# Altium PCB B219.PcbDoc
Units mm, origin at the board's own origin, x right, y up, seen from the top; angles counter-clockwise.
Board outline 22 x 40 mm, 4 copper layers (Top Copper, Signal Layer 1, Signal Layer 2, Bottom Copper), stack 1.57 mm thick; 31 components, 34 nets, 141 pads, 138 vias.
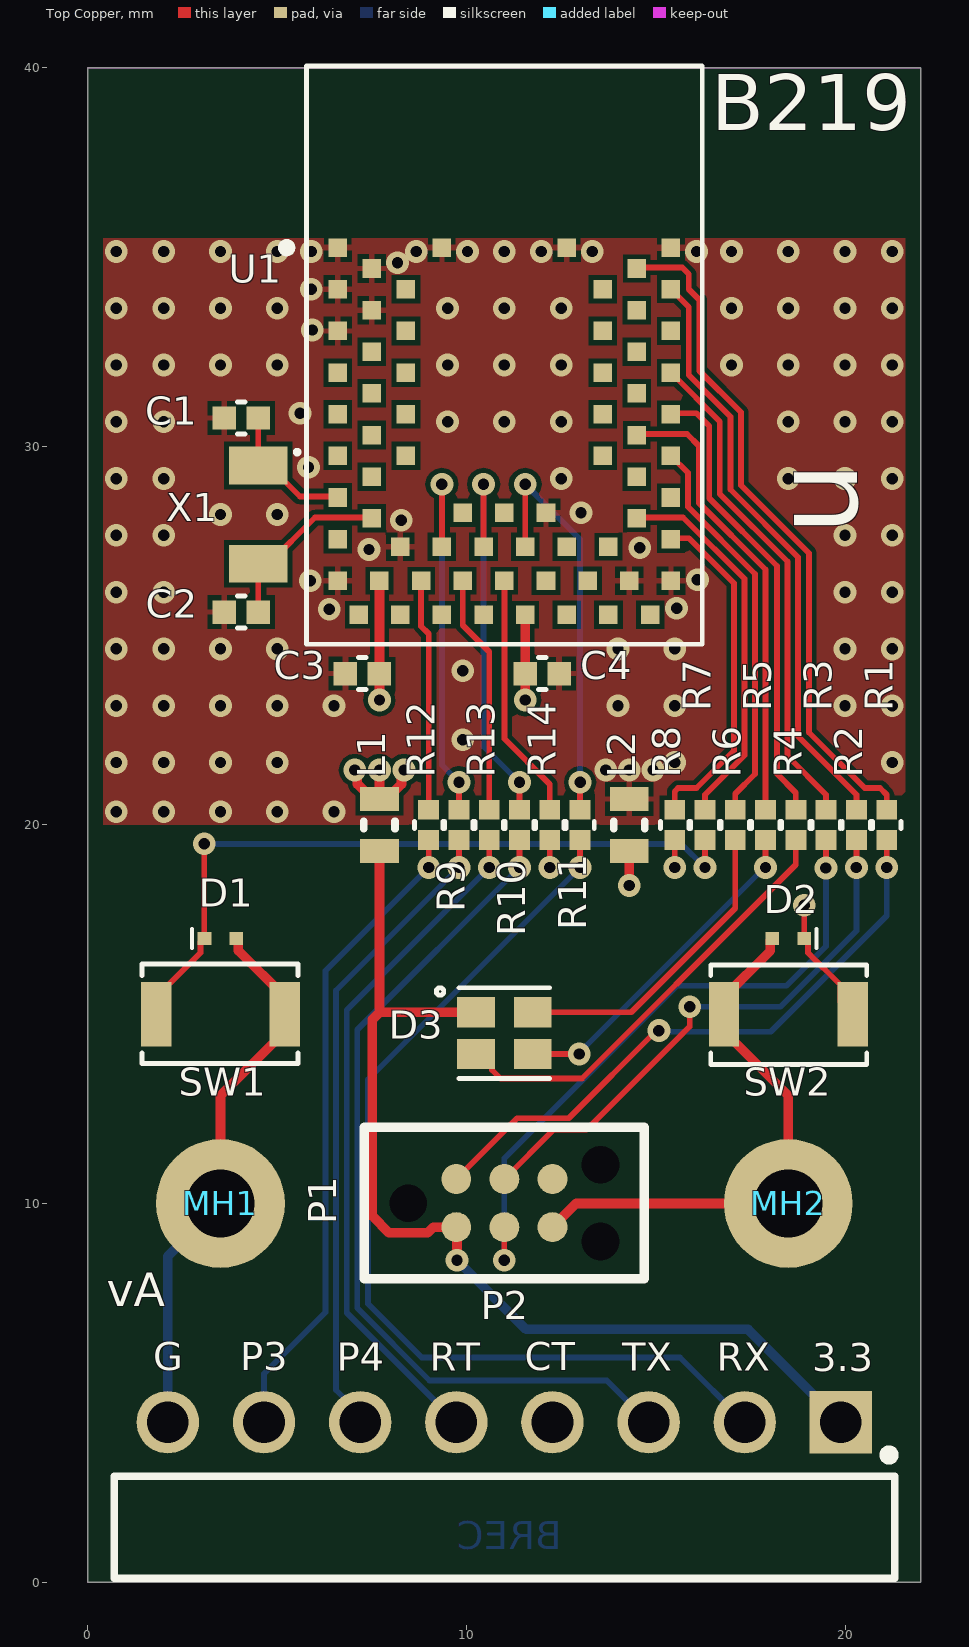
[diagram p0: Top Copper view]
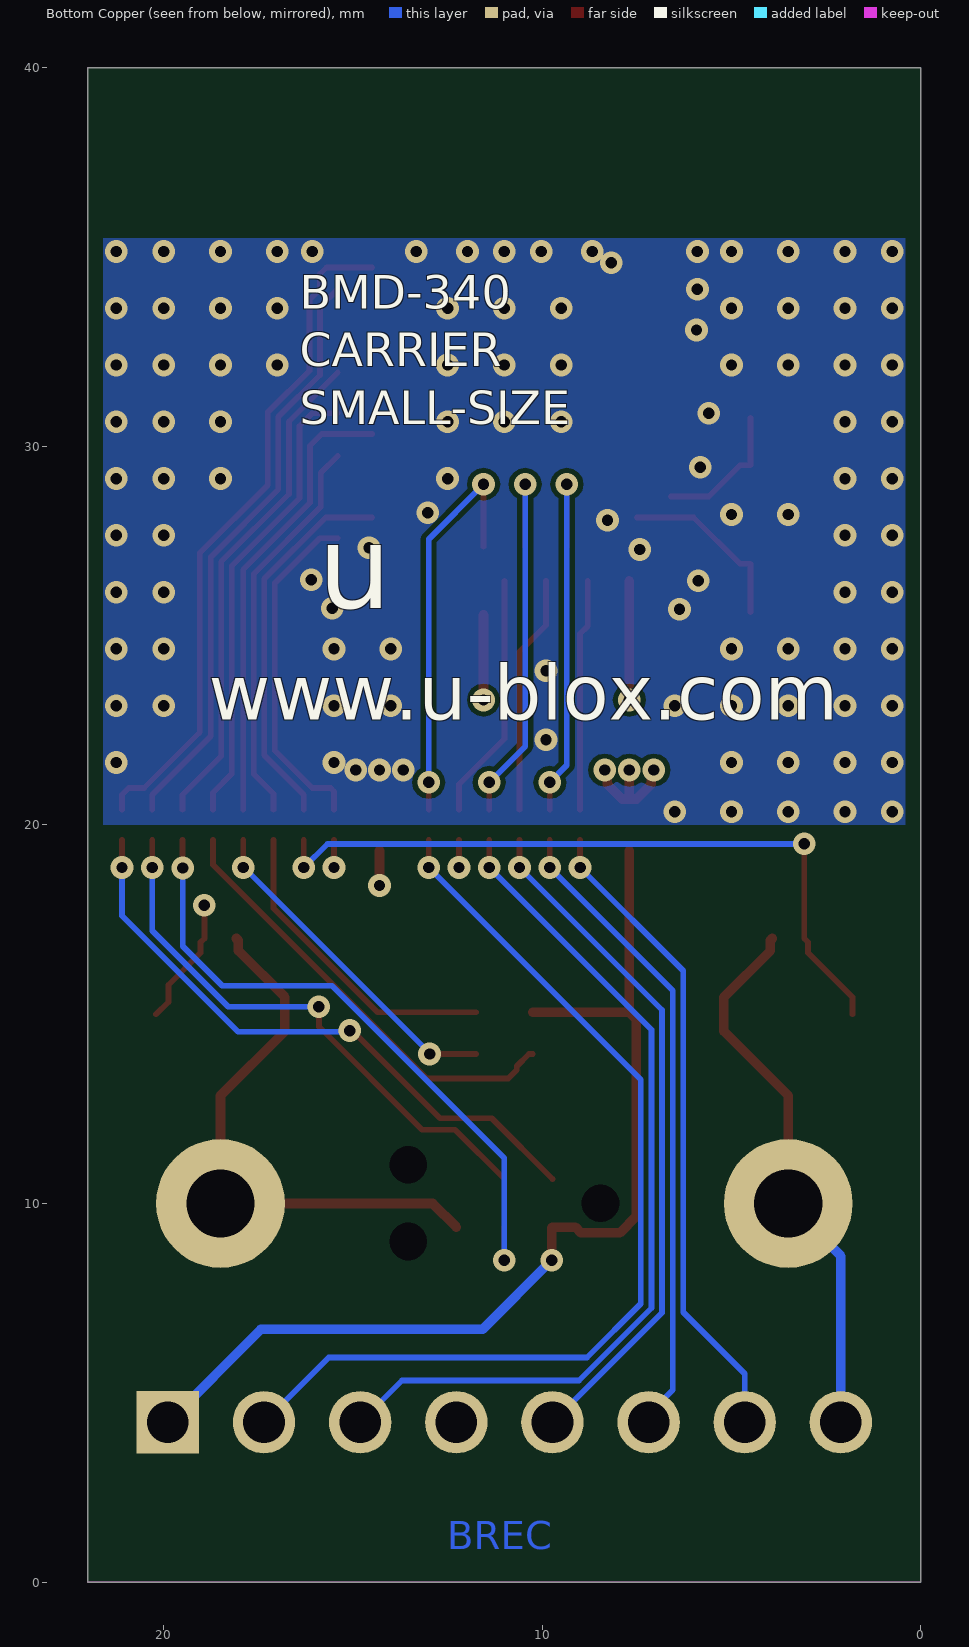
[diagram p1: Bottom Copper view, seen from below]
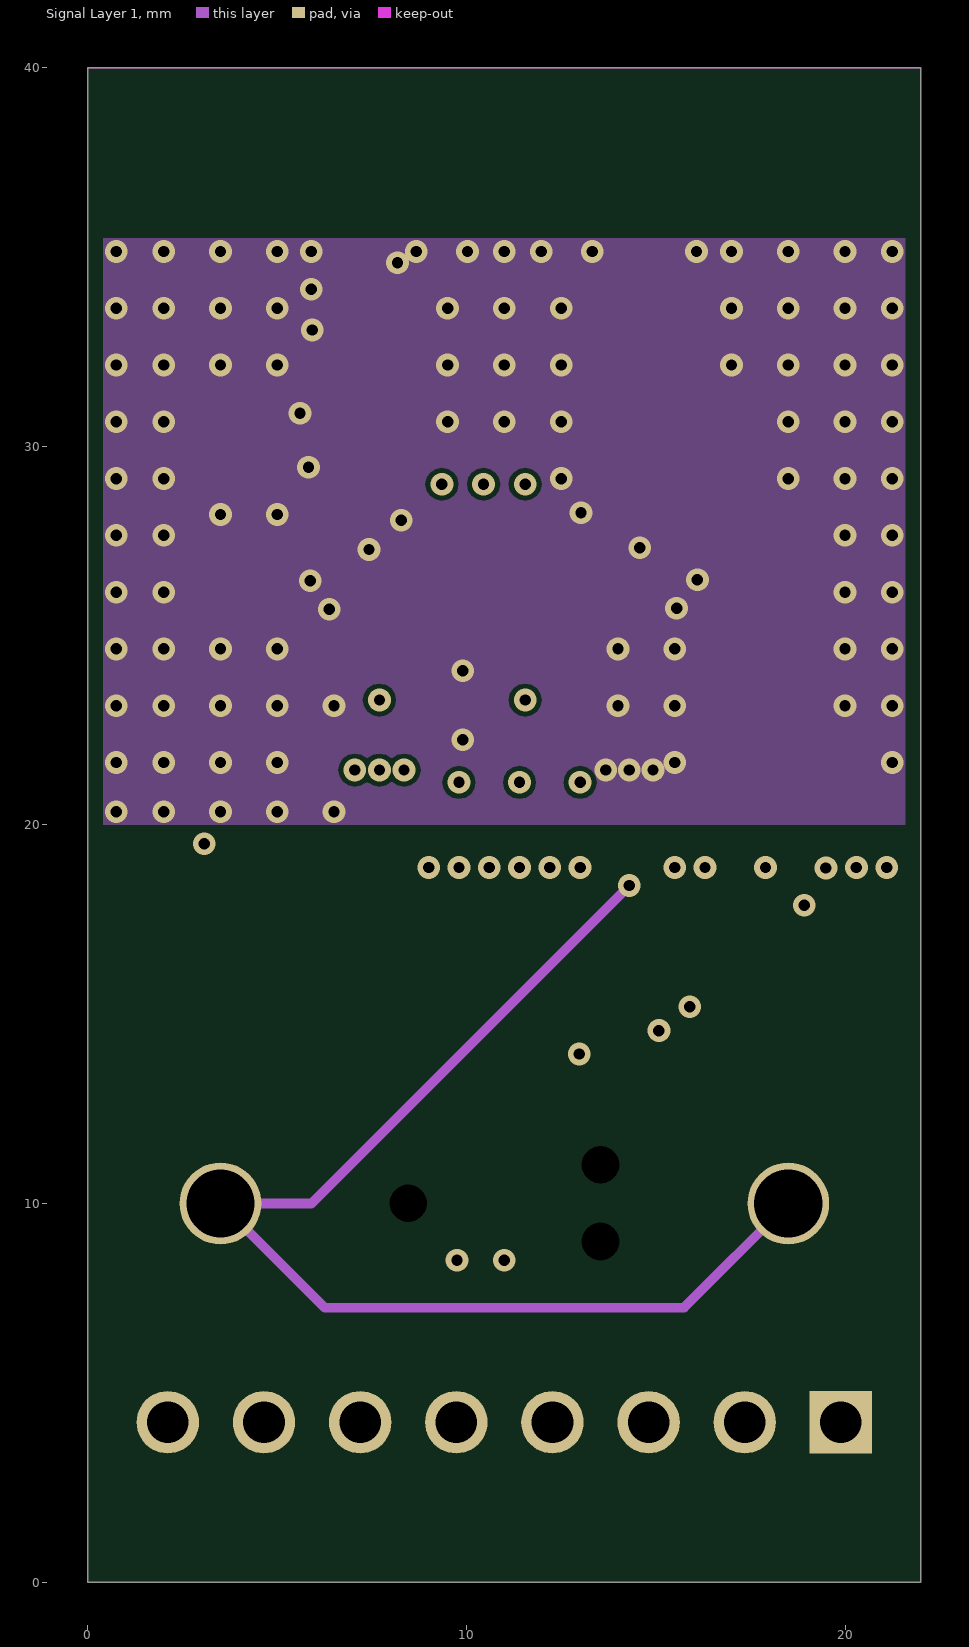
[diagram p2: Signal Layer 1]
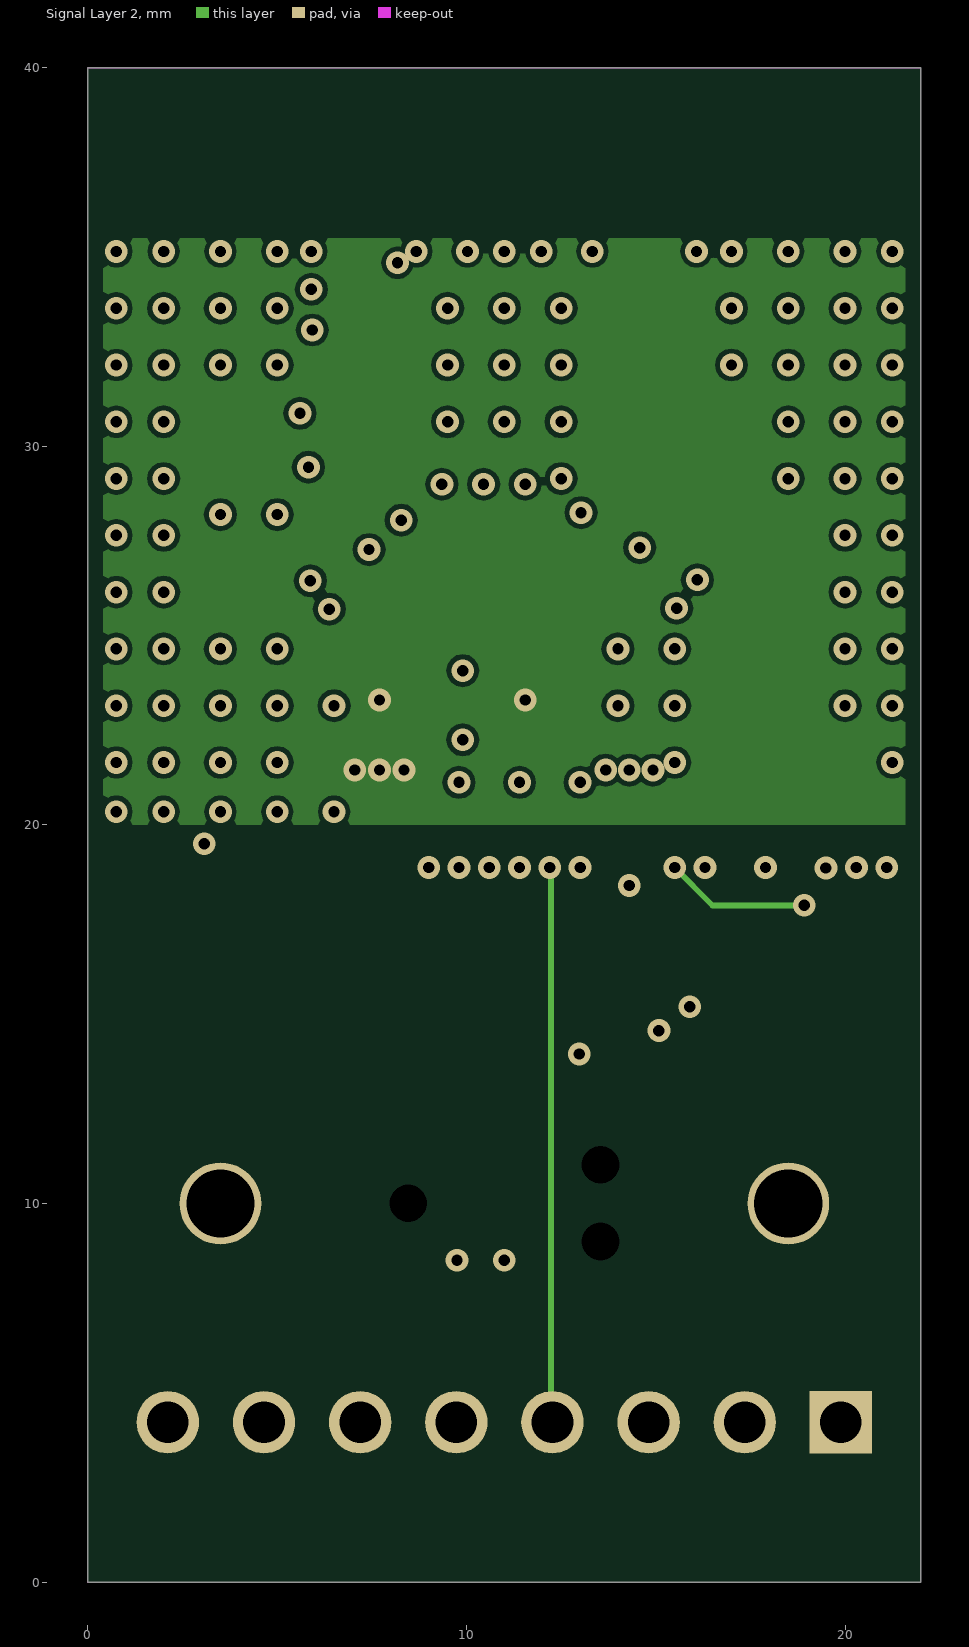
[diagram p3: Signal Layer 2]

## Layer stack, top to bottom
Top Mask: solder mask 0.015, Solder Resist, Dk 3.8
Top Copper: signal copper 0.035
Dielectric 1: prepreg 0.1, 2313, Dk 4.05
Signal Layer 1: signal copper 0.0175
Core: core 1.265, FR-4, Dk 4.5
Signal Layer 2: signal copper 0.0175
Dielectric 2: prepreg 0.1, 2313, Dk 4.05
Bottom Copper: signal copper 0.035
Bottom Mask: solder mask 0.015, Solder Resist, Dk 3.8

## Board outline
0,40 22,40 22,0 0,0

## Design rules (kind name [scope] priority, off if disabled: settings)
BoardOutlineClearance [All] p1: gap=0.4 ignorepadtopadclearanceinfootprint=FALSE
Clearance "Stitching GND" [IsStitchingVia and InNet('GND') vs (IsVia and (Not IsStitchingVia)) Or IsPad] p1: gap=0.127 ignorepadtopadclearanceinfootprint=TRUE
Clearance Clearance_Poly [InPolygon vs OnLayer('Keep-Out Layer') OR (OnLayer('Multi-Layer') AND IsPad  AND Not(PadIsPlated))] p2: gap=0.127 ignorepadtopadclearanceinfootprint=TRUE
Clearance [All] p3: gap=0.127 ignorepadtopadclearanceinfootprint=FALSE except(0: Arc-Text Arc-Hole Track-Text Track-Hole SMDPad-Text SMDPad-Hole THPad-Text THPad-Hole Via-Text Via-Hole Fill-Text Fill-Hole Poly-Text Poly-Hole Region-Text Region-Hole Text-Text Text-Hole)
ComponentClearance [All] p1: gap=0.127 collisioncheckmode=3 verticalgap=0.254 showdistances=FALSE
DiffPairsRouting .14 [All] p1: maxlimit=0.254 minlimit=0.1 mostfreqgap=0.254 toplayer_maxgap=0.1 toplayer_prefgap=0.1 toplayer_minwidth=0.1 toplayer_maxwidth=0.1 toplayer_prefwidth=0.1 midlayer1_mingap=0.254 midlayer1_minwidth=0.381 midlayer1_maxwidth=0.381 midlayer1_prefwidth=0.381 midlayer2_mingap=0.254 midlayer2_minwidth=0.381 midlayer2_maxwidth=0.381 midlayer2_prefwidth=0.381 bottomlayer_maxgap=0.1 bottomlayer_prefgap=0.1 bottomlayer_minwidth=0.1 bottomlayer_maxwidth=0.1 bottomlayer_prefwidth=0.1 maxuncoupledlength=12.7
Height [All] p1: minheight=0 maxheight=25.4 prefheight=2.54
HoleSize [All] p1: absolutevalues=TRUE maxlimit=2540 minlimit=0.127 maxpercent=80.000 minpercent=20.000
HoleToHoleClearance [All] p1: gap=0.152 allowstackedmicrovias=TRUE
MinimumSolderMaskSliver [All] p1: minsoldermaskwidth=0.025
PlaneClearance [InPoly] p1: clearance=0.254
PlaneConnect [All] p1: pad.planeconnectstyle=Relief pad.reliefexpansion=0.508 pad.reliefentries=4 pad.reliefconductorwidth=0.254 pad.reliefairgap=0.254 via.planeconnectstyle=Direct via.reliefexpansion=0.508 via.reliefentries=4 via.reliefconductorwidth=0.254 via.reliefairgap=0.254
PolygonConnect ThermalVias [IsVia] p1: connectstyle=Direct reliefconductorwidth=0.254 reliefentries=4 polygonreliefangle="90 Angle" airgapwidth=0.254
PolygonConnect "PolygonConnect - Power" [InNetClass('')] p2: connectstyle=Relief reliefconductorwidth=0.254 reliefentries=4 polygonreliefangle="90 Angle" airgapwidth=0.127
PolygonConnect PolygonConnect-BGA [InComponentClass('')] p3: connectstyle=Relief reliefconductorwidth=0.152 reliefentries=4 polygonreliefangle="45 Angle" airgapwidth=0.152
PolygonConnect PolygonConnect-General [All] p4: connectstyle=Relief reliefconductorwidth=0.152 reliefentries=4 polygonreliefangle="90 Angle" airgapwidth=0.127
RoutingVias [All] p1: holewidth=0.3 width=0.6 viastyle="Through Hole" minholewidth=0.2 minwidth=0.5 maxholewidth=7 maxwidth=1
SMDEntry [All] p1 off: side=TRUE corner=TRUE anyangle=TRUE
SilkToBoardRegionClearance [All] p1 off:
SilkToSilkClearance [All] p1 off: silktosilkclearance=0.025
SilkToSolderMaskClearance [IsPad] p1 off: minsilkscreentomaskgap=0 clearancetoexposedcopper=TRUE
SolderMaskExpansion SolderMaskExpansion_via [IsVia] p1: expansion=-0.254 istentingtop=TRUE
SolderMaskExpansion [All] p2: expansion=0.05 istentingtop=FALSE
UnRoutedNet [All] p1: checkbadconnections=TRUE
ViasUnderSMD [All] p1: allowed=FALSE
Width [All] p1: maxlimit=2.54 minlimit=0.127 preferedwidth=0.152 toplayer_maxwidth=0.254 toplayer_prefwidth=0.152 bottomlayer_maxwidth=0.254 bottomlayer_prefwidth=0.152 minimp=50.000000 maximp=50.000000 favimp=50.000000
Width Width_1 [All] p2: maxlimit=0.254 minlimit=0.254 preferedwidth=0.254
18 further rules are at their usual default settings.

## Components (designator, comment, footprint, x,y, rotation, side; value= is the part's Value field where it differs from the comment)
C1 "UBXH01-000411410P" "Cap 0402" 4.05,30.75 r180 top value=10P
C2 "UBXH01-000411410P" "Cap 0402" 4.05,25.625 r180 top value=10P
C3 "UBXH01-2021002100N" "Cap 0402" 7.25,24 r180 top value=100N
C4 "UBXH01-2021002100N" "Cap 0402" 12,24 r0 top value=100N
D1 "110-00019" SOD-923 3.5,17 r0 top
D2 "110-00019" SOD-923 18.5,17 r180 top
D3 "115-00011" 4-PLCC 11,14.5 r180 top
L1 "LQW18AN22NJ10D" INDC1608X100X30LL20T10 7.7,20 r90 top
L2 "LQW18AN22NJ10D" INDC1608X100X30LL20T10 14.3,20 r90 top
MH1 "MH_M1.5DNP" MH_M1.5 3.5,10 r0 top
MH2 "MH_M1.5DNP" MH_M1.5 18.5,10 r0 top
P1 "TC2030-IDC-NLDNP" TC2030-IDC-NL 8.46,10.01 r0 top
P2 "61300811021" 61300811021 11,1.45 r0 top
R1 "UBXH18-0008033220R" "RES 0402 HD" 21.1,20 r270 top value=220R
R2 "UBXH18-0008033220R" "RES 0402 HD" 20.3,20 r270 top value=220R
R3 "UBXH18-0008033220R" "RES 0402 HD" 19.5,20 r270 top value=220R
R4 "180-00031499R" "RES 0402 HD" 18.7,20 r270 top value=499R
R5 "180-00098220R" "RES 0402 HD" 17.9,20 r270 top value=220R
R6 "180-00098220R" "RES 0402 HD" 17.1,20 r270 top value=220R
R7 "UBXH18-0008033220R" "RES 0402 HD" 16.3,20 r270 top value=220R
R8 "UBXH18-0008033220R" "RES 0402 HD" 15.5,20 r270 top value=220R
R9 "UBXH18-0008033220R" "RES 0402 HD" 9.8,20 r90 top value=220R
R10 "UBXH18-0008033220R" "RES 0402 HD" 11.4,20 r90 top value=220R
R11 "UBXH18-0008033220R" "RES 0402 HD" 13,20 r90 top value=220R
R12 "UBXH18-0008033220R" "RES 0402 HD" 9,20 r90 top value=220R
R13 "UBXH18-0008033220R" "RES 0402 HD" 10.6,20 r90 top value=220R
R14 "UBXH18-0008033220R" "RES 0402 HD" 12.2,20 r90 top value=220R
SW1 "135-00007" B3U-1000P 3.5,15 r0 top
SW2 "135-00007" B3U-1000P 18.5,15 r180 top
U1 "=Value" BMD_LGA68S_1500X1020X190_PCB 11,32.4 r0 top
X1 "100-00005" XTAL_3215 4.5,28.2 r270 top

## Footprints (in the part's own frame and the unit in brackets; to place one, negate y for a bottom-side part, rotate by r counter-clockwise, add the part's x,y. Pads: shape width x height; smd on the part's side, far side on the other; paste and mask are expansions set on the pad)
4-PLCC [mm] "4 Pin Plastic Leaded Chip Carrier, 2mm x 2mm"
  rect 1x0.8 smd: 1(0.75,-0.55) 2(-0.75,-0.55) 3(-0.75,0.55) 4(0.75,0.55)
  silkscreen extent -1.2,-1.2 1.8,1.2, body extent -1.05,-1.05 1.05,1.05, height 1.01
61300811021 [mm]
  rect 1.65x1.65 hole 1.1: 1(8.89,2.77)
  round 1.65 hole 1.1: 2(6.35,2.77) 3(3.81,2.77) 4(1.27,2.77) 5(-1.27,2.77) 6(-3.81,2.77) 7(-6.35,2.77) 8(-8.89,2.77)
  silkscreen extent -10.31,-1.35 10.31,2.03, body extent -10.16,-7.27 10.16,3.09, height 2.58
B3U-1000P [mm] "Button Tactile, SMT 4mm x 2.5mm, height 1.2mm"
  rect 0.8x1.7 smd: 1(-1.7,0) 2(1.7,0)
  silkscreen extent -2.07,-1.3 2.05,1.33, body extent -2,-1.25 2,1.25, height 1.6
BMD_LGA68S_1500X1020X190_PCB [mm] "LGA, 68pin, 1.1mm Pitch, 15mm x 10.2mm"
  rect 0.49x0.49 smd: 1(-4.4,2.85) 2(-3.5,2.3) 3(-4.4,1.75) 4(-3.5,1.2) 5(-4.4,0.65) 6(-3.5,0.1) 7(-4.4,-0.45) 8(-3.5,-1) 9(-4.4,-1.55) 10(-3.5,-2.1) 11(-4.4,-2.65) 12(-3.5,-3.2) 13(-4.4,-3.75) 14(-3.5,-4.3) 15(-4.4,-4.85) 16(-4.4,-5.95) 17(-3.3,-5.95) 18(-2.75,-5.05) 19(-2.2,-5.95) 20(-1.65,-5.05) 21(-1.1,-5.95) 22(-0.55,-5.05) 23(0,-5.95) 24(0.55,-5.05) 25(1.1,-5.95) 26(1.65,-5.05) 27(2.2,-5.95) 28(2.75,-5.05) 29(3.3,-5.95) 30(4.4,-5.95) 31(4.4,-4.85) 32(3.5,-4.3) 33(4.4,-3.75) 34(3.5,-3.2) 35(4.4,-2.65) 36(3.5,-2.1) 37(4.4,-1.55) 38(3.5,-1) 39(4.4,-0.45) 40(3.5,0.1) 41(4.4,0.65) 42(3.5,1.2) 43(4.4,1.75) 44(3.5,2.3) 45(4.4,2.85) 46(1.65,2.85) 47(-1.65,2.85) 48(-2.6,1.75) 49(-2.6,0.65) 50(-2.6,-0.45) 51(-2.6,-1.55) 52(-2.6,-2.65) 53(-1.1,-4.15) 54(0,-4.15) 55(1.1,-4.15) 56(2.6,-2.65) 57(2.6,-1.55) 58(2.6,-0.45) 59(2.6,0.65) 60(2.6,1.75) 61(-3.85,-6.85) 62(-2.75,-6.85) 63(-1.65,-6.85) 64(-0.55,-6.85) 65(0.55,-6.85) 66(1.65,-6.85) 67(2.75,-6.85) 68(3.85,-6.85)
  Multi-Layer pour cut-out: -5.1,3.1 5.1,3.1 5.1,7.5 -5.1,7.5
  silkscreen extent -5.85,-7.63 5.23,7.65, body extent -5.1,-7.5 5.1,7.5, height 1.87
"Cap 0402" [mm] "Chip Capacitor, 2-Leads, Body 1.00x0.50mm, IPC Medium Density"
  rect 0.62x0.62 smd: 1(-0.45,0) 2(0.45,0)
  silkscreen extent -0.1,-0.43 0.1,0.43, body extent -0.55,-0.3 0.55,0.3, height 0.6
INDC1608X100X30LL20T10 [mm] "Chip Inductor, 2-Leads, Body 1.8x1.1mm, IPC High Density"
  rect 0.64x1.02 smd: 1(-0.685,0) 2(0.685,0)
  silkscreen extent -0.1,-0.41 0.1,0.41, body extent -0.9,-0.55 0.9,0.55, height 1
MH_M1.5 [mm] "Mounting Hole M1.5 Metric, 3.4mm diameter pad"
  round 3.4 / inner round 2.159 / far side round 3.4 hole 1.8: 1(0,0)
"RES 0402 HD" [mm] "Chip Resistor, 2-Leads, Body 1.05x0.54mm, IPC High Density"
  rect 0.52x0.55 smd: 1(-0.4,0) 2(0.4,0)
  silkscreen extent -0.1,-0.38 0.1,0.38, body extent -0.55,-0.3 0.55,0.3, height 0.4
SOD-923 [mm] "SOD-923, 2-Leads, Body 1.25x2.50mm, IPC High Density,"
  rect 0.36x0.35 smd mask+0.05: 1(-0.42,0) 2(0.42,0)
  silkscreen extent -0.75,-0.25 -0.75,0.25, body extent -0.4,-0.3 0.4,0.3, height 0.4
TC2030-IDC-NL [mm] "Tag-Connect 6-Pin No Legs"
  round 0.9 hole 0.995 unplated: 0(0,0) 0(5.08,-1.016) 0(5.08,1.016)
  round 0.79 smd paste-0.39: 1(1.27,-0.635) 2(1.27,0.635) 3(2.54,-0.635) 4(2.54,0.635) 5(3.81,-0.635) 6(3.81,0.635)
  silkscreen extent -1.16,-2 6.24,2
XTAL_3215 [mm] "XTAL, 2-Leads, Body 1.50x3.20mm"
  rect 1x1.55 smd: 1(-1.3,0) 2(1.3,0)
  silkscreen extent -1.7,0.98 -1.6,1.07, body extent -1.65,-0.8 1.65,0.8, height 0.9

## Part data
C1 C2: library part UBXH01-0004114, "CAP CER COG 0402", Manufacturer="Murata Manufacturing Company, Ltd.", Manufacturer 2=None, Manufacturer P/N=GRM1555C1H100CZ01, Max Voltage=25.0V, Tolerance=5%, Automotive=None, Critical=None, Editor=martin.frauchiger, Env=ROHS, Manufacturer 3=None, Manufacturer P/N 2=None, Manufacturer P/N 3=None, Max Current=None, Max Operating Temp=None, Max Power=None, Mfg P/N Datasheet=None, Mfg P/N Datasheet 2=None, Mfg P/N Datasheet 3=None, Mfg P/N Released=Yes, Mfg P/N Released 2=None, Mfg P/N Released 3=None, Mfg P/N Split=0, Mfg P/N Split 2=None, Mfg P/N Split 3=None, Mfg P/N Status=Obsolete, Mfg P/N Status 2=None, Mfg P/N Status 3=None, Min Operating Temp=None, Part Number=UBXH01-0004114, Part Type=Capacitor, Perferred=PREF, Permitted Use="Volume Products", RefDes=C, Release Data="2005-09-01 15:36:53", Released by=martin.frauchiger, Single Source=None, Size=0x0y, UBX Wiki=https://wiki.u-blox.com/bin/view/Operations/PartDetails?index=5225
C3 C4: library part UBXH01-2021002, "CAP CER X5R 0402", Manufacturer="Samsung Electro-Mechanics", Manufacturer 2=None, Manufacturer P/N=CL05A104KP5NNN, Max Voltage=10.0V, Tolerance=10%, Automotive=None, Critical=None, Editor=roland.rust, Env=GREEN, Manufacturer 3=None, Manufacturer P/N 2=None, Manufacturer P/N 3=None, Max Current=None, Max Operating Temp=None, Max Power=None, Mfg P/N Datasheet=https://wiki.u-blox.com/bin/view/Generic/Docs/DocumentSummary?index=28113, Mfg P/N Datasheet 2=None, Mfg P/N Datasheet 3=None, Mfg P/N Released=Yes, Mfg P/N Released 2=None, Mfg P/N Released 3=None, Mfg P/N Split=0, Mfg P/N Split 2=None, Mfg P/N Split 3=None, Mfg P/N Status=Active, Mfg P/N Status 2=None, Mfg P/N Status 3=None, Min Operating Temp=None, Part Number=UBXH01-2021002, Part Type=Capacitor, Perferred=PREF, Permitted Use="Volume Products", RefDes=C, Release Data="2005-07-22 13:59:44", Released by=roland.rust, Single Source=None, Size=0x0y, UBX Wiki=https://wiki.u-blox.com/bin/view/Operations/PartDetails?index=5759
D1 D2: "Diode, ESD9B, 3.3V, ST5G, SOD-923", Manufacturer="ON Semiconductor", Manufacturer P/N=ESD9B3.3ST5G, MFG Package=SOD-923, Package Type=SOD, Part Name="Diode TVS 3.3V SOD-923", Voltage=3.3V, Arena Link=https://app.bom.com/a/4M5DJQ9Q9SR7DV4H?v=spec.summary, Body Size="0.8mm x 0.6mm", Component Mounting Type=SMT, Diode Type=TVS, Height=0.4mm, Item_Phase=Production, Part Number=110-00019, Part_Type=Diode, Pins=2, Revision=0A, Supplier 1=Arrow, Supplier Part Number 1=ESD9B3.3ST5G, Use in new designs=Yes
D3: "LED, RGB Diffused SMT, PLCC4 4 Pin", Color=RGB, Current="20mA Red, 10mA Green, 10mA, Blue", Manufacturer="Cree, Inc.", Manufacturer P/N=CLMVB-FKA-CFHEHLCBB7a363, MFG Package=PLCC4, Package Type=Custom, Part Name="LED RGB SMT 2mm x 2mm", Supplier Part Number 1=941-CLMVBFKACFHEHLCB, Voltage=5V, Arena Link=https://app.bom.com/a/UCV39GZGZIHY581D?v=spec.summary, Body Size="2.0mm x 2.0mm", Component Mounting Type=SMT, Height=1mm, Item_Phase=Production, Mounting Type=Vertical, Number of Circuits=3, Part Number=115-00011, Part_Type=LED, Pins=4, Revision=0A, Supplier 1=Mouser, Use in new designs=Yes, Vf="2V Red, 3V Green, 3V Blue"
L1 L2: library part CMP-2000-06600-1, "Chip Inductor, 22 nH, +/-5%, 640 mA, -55 to 125 degC, 0603 (1608 Metric), RoHS, Tape and Reel", Current Rating=640mA, DC Resistance (DCR)=99mOhmMax, Frequency - Self Resonant=3.2GHz, Frequency - Test=100MHz, Inductance=22nH, Manufacturer=Murata, Operating Temperature=-55°C~125°C, Package / Case=0603(1608Metric), Package Description="2-Pin Surface Mount Device, Body 1.6 x 0.8 mm", Package Reference=0603, Q @ Freq=42@250MHz, Standard Package=1, Tolerance=±5%, Category=Inductors,Coils,Chokes, Datasheet URL=http://search.murata.co.jp/Ceramy/image/img/PDF/ENG/L0075S0080LQW18A_10.pdf, Datasheet Version=11/2011, Family=FixedInductors, Height - Seated (Max)="0.039\"(1.00mm)", Manufacturer URL=http://www.murata.com/, Material - Core=Non-Magnetic, Mounting Technology=SurfaceMount, Mounting Type=SurfaceMount, Online Catalog=LQWSeries, Other Names=490-6876-1, Packaging=CutTape(CT), Product Training Modules=InductorProductsChipRFInductors, Series=LQW18A_10, Shielding=Unshielded, Size / Dimension="0.063\"Lx0.031\"W(1.60mmx0.80mm)", Type=Wirewound
MH1 MH2: library part MH_M1.5, "1.5M screw mounting hole, plated", Added By="Jeremy D", Added Date=7/9/2015, DNP=DNP, Height=0mm, Part Number=MH_M1.5, Size="3.4mm x 3.4mm", Type="Mounting Hole"
P1: library part TC2030-IDC-NL, "CON PADS FOR CBL PLUG-OF-NAILS 6-PIN NO LEGS", Manufacturer="TAG Connect", Added By="Paul B", Added Date=4/22/2015, DNP=DNP, Height=0, Manufacturer P/N=TC2030-IDC-NL, Part Number=TC2030-IDC-NL, Size="6.731mm x 12.446mm"
P2: library part CMP-1502-01075-1, "THT Angled Pin Header WR-PHD, Pitch 2.54 mm, Single Row, 8 pins", Contact Resistance=20mOhm, Manufacturer="Wurth Electronics", Operating Temperature=-40to105degC, Rated Current=3A, Withstanding Voltage=500VAC, Working Voltage=250VAC, Datasheet URL=https://katalog.we-online.de/em/datasheet/6130xx11021.pdf, Gender=Male, Manufacturer Part Number=61300811021, Manufacturer URL=http://www.we-online.de, Mounting Technology=THT, Orientation=Angled, Package Reference=61300811021, Packaging=Bag, Part Number=61300811021, Pin Number=8, Pitch=2.54mm, Publisher=WurthElektronik, Row Number=Single
R1 R2 R3 R7 R8 R9 R10 R11 R12 R13 R14: library part UBXH18-0008033, "RES THICK FILM CHIP 0402", Manufacturer=YAGEO, Manufacturer 2=None, Manufacturer P/N=2322_705_87221_L, Max Power=100mW, Tolerance=5%, Automotive=None, Critical=None, Editor=roland.rust, Env=ROHS, Manufacturer 3=None, Manufacturer P/N 2=None, Manufacturer P/N 3=None, Max Current=None, Max Operating Temp=None, Max Voltage=None, Mfg P/N Datasheet=None, Mfg P/N Datasheet 2=None, Mfg P/N Datasheet 3=None, Mfg P/N Released=Yes, Mfg P/N Released 2=None, Mfg P/N Released 3=None, Mfg P/N Split=0, Mfg P/N Split 2=None, Mfg P/N Split 3=None, Mfg P/N Status=NRND, Mfg P/N Status 2=None, Mfg P/N Status 3=None, Min Operating Temp=None, Part Number=UBXH18-0008033, Part Type=Resistor, Perferred=PREF, Permitted Use="Volume Products", RefDes=R, Release Data="2009-04-24 14:36:39", Released by=roland.rust, Single Source=None, Size=0x0y, UBX Wiki=https://wiki.u-blox.com/bin/view/Operations/PartDetails?index=6914
R4: library part 180-00031, "Resistor, 499ohm, 1%, 1/16W, 0402", Manufacturer="Rohm Semiconductor", Manufacturer 2="Samsung Electro-Mechanics America, Inc", Manufacturer P/N=MCR01MRTF4990, Manufacturer P/N 2=RC1005F4990CS, Part Name="RES SMD 499 OHM 1% 1/16W 0402", Power=1/16W, Supplier Part Number 1=RHM499CDCT-ND, Tolerance="+/- 1%", Alternate Footprint Ref="RES 0402", Arena Link=https://app.bom.com/a/Q8RZ5CVCVEDU1SS5?v=spec.summary, Component Mounting Type=SMT, Height=0.4mm, Item_Phase=Production, Part Number=180-00031, Part_Type=Resistor, Pins=2, Revision=0D, Size=0402, Supplier 1=Digi-Key, Supplier 2=Digi-Key, Supplier Part Number 2=1276-3992-1-ND, Use in new designs=Yes
R5 R6: library part 180-00098, "Resistor, 220ohm, 5%, 1/16W, 0402.", Manufacturer="Panasonic Electronic Components", Manufacturer 2="Samsung Electro-Mechanics America, Inc", Manufacturer P/N=ERJ-2GEJ221X, Manufacturer P/N 2=RC1005J221CS, Part Name="RES SMD 220 OHM 5% 1/16W 0402", Power=1/16W, Supplier Part Number 1=P220JCT-ND, Tolerance="+/- 5%", Alternate Footprint Ref="RES 0402", Arena Link=https://app.bom.com/a/8Q9HNUDUDWVBJC30?v=spec.summary, Component Mounting Type=SMT, Height=0.4mm, Item_Phase=Production, Part Number=180-00098, Part_Type=Resistor, Pins=2, Revision=0C, Size=0402, Supplier 1=Digi-Key, Supplier 2=Digi-Key, Supplier Part Number 2=1276-4360-1-ND, Use in new designs=Yes
SW1 SW2: "Button, Momentary SPST-NO, 0.05A, 12V, 3mm x 2.5mm", Current=50mA, Manufacturer="Omron Electronics Inc-EMC Div", Manufacturer P/N=B3U-1000P, Part Name="SWITCH TACTILE SPST-NO 0.05A 12V", Supplier Part Number 1=SW1020CT-ND, Voltage=12VDC, Arena Link=https://app.bom.com/a/TBU28FYFYHGV5FQ0?v=spec.summary, Body Size="3mm x 2.5mm", Component Mounting Type=SMT, Height=1.2mm, Item_Phase=Production, Part Number=135-00007, Part_Type=Button, Pins=2, Revision=0A, Supplier 1=Digi-Key, Switch/Button Circuit=SPST, Switch/Button Function=Off-Mom, Use in new designs=Yes
U1: library part BMD-340, "u-blox BMD-340 Bluetooth 5 LE, 802.15.4 module", Manufacturer=u-blox, Manufacturer P/N=BMD-340-A-R, Body Size="15mm x 10.2mm", Height=1.9mm, Internal Antenna=PCB, Part Number=BMD-340, Protocol="BT 5 LE, 802.15.4, 2.4GHz Proprietary"
X1: "XTAL, 2Pin, 32.768kHz, 7pF 20ppm", Frequency=32.768kHz, Frequency Tolerance=20ppm, Manufacturer=Epson, Manufacturer 2="AVX Corporation", Manufacturer P/N="FC-135 32.7680KA-AG3", Manufacturer P/N 2=ST3215SB32768C0HPWBB, MFG Package=2-SMD, Part Name="XTAL 32.768kHz 7pF 20ppm 3215", Supplier Part Number 1=SER4086CT-ND, Arena Link=https://app.bom.com/a/L3MU07Q7Q98O5PC8?v=spec.summary, Body Size="3.2mm x 1.5mm", CL=7pF, Component Mounting Type=SMT, Height=0.9mm, Item_Phase=Production, Part Number=100-00005, Part_Type=Crystal/Oscillator, Pins=2, Revision=0C, Supplier 1=Digi-Key, Supplier 2=Digi-Key, Supplier Part Number 2=1253-1113-1-ND, Use in new designs=Yes

## Via types
v1: diameter 0.6, hole 0.3, Top Copper to Bottom Copper, tented both sides, 138 vias

## Nets (pads, with @x,y where several pads share a name; then routed paths per layer and width w, separated by ;. In a path a pad name is that pad's centre, name@x,y a point inside that pad or via, vN(x,y) a via of type N, cw(c..) or ccw(c..) an arc to the next point about the centre after c; other vN are vias at no path point)
3V3: D3.1 L1.1 P1.1 P2.1 | length 27.5
  Top Copper w0.254: L1.1 7.7,15.05 ; v1(9.75,8.5) 9.75,9.355 P1.1 9.125,9.375 8.975,9.225 7.95,9.225 7.511,9.664 7.511,14.861 7.7,15.05 ; D3.1 7.7,15.05
  Bottom Copper w0.254: v1(9.75,8.5) 11.575,6.675 17.435,6.675 P2.1
3V3_M: C3.1 C4.1 L1.2 U1.17 U1.65 | length 8.5
  Top Copper w0.254: v1(7.05,21.45) 7.116,21.384 7.116,21.079 7.51,20.685 L1.2 ; v1(7.7,21.45) L1.2 ; v1(7.7,23.3) U1.17 ; v1(8.35,21.45) 8.284,21.384 8.284,21.079 7.89,20.685 L1.2 ; v1(11.55,23.3) U1.65
B1_M: R7.1 U1.32 | length 10
  Top Copper w0.152: U1.32@14.5,28.125 15.72,28.125 17.342,26.503 17.342,21.842 16.3,20.8 R7.1
B2_M: R8.1 U1.31 | length 9.1
  Top Copper w0.152: U1.31@15.4,27.575 15.875,27.575 17.063,26.387 17.063,21.963 16.075,20.975 15.589,20.975 15.5,20.886 R8.1
BLUE: D3.2 R6.2 | length 8.3
  Top Copper w0.152: D3.2 14.35,15.05 17.1,17.8 R6.2
BLUE_M: R6.1 U1.35 | length 10.5
  Top Copper w0.152: U1.35 15.848,29.302 15.848,28.404 17.621,26.631 17.621,21.346 17.1,20.825 R6.1
BUTTON_1: D1.1 R7.2 SW1.1 | length 19.2
  Top Copper w0.152: SW1.1 1.8,15.45 2.976,16.626 2.976,16.901 3.075,17 D1.1 3.075,17.005 v1(3.075,19.5) ; v1(16.3,18.875) R7.2
  Bottom Copper w0.152: v1(3.075,19.5) 15.675,19.5 v1(16.3,18.875)
BUTTON_2: D2.1 R8.2 SW2.1 | length 8
  Top Copper w0.152: v1(15.5,18.875) R8.2 ; v1(18.925,17.875) 18.922,17.873 18.922,17.003 D2.1 18.925,17 19.024,16.901 19.024,16.626 19.876,15.774 19.876,15.324 SW2.1
  Signal Layer 2 w0.152: v1(15.5,18.875) 16.5,17.875 v1(18.925,17.875)
CTS: P2.4 R14.1 | length 15.4
  Top Copper w0.152: v1(12.2,18.875) R14.1
  Signal Layer 2 w0.152: v1(12.2,18.875) 12.235,18.84 12.235,4.255 P2.4
GND: D1.2 D2.2 L2.1 MH1.1 MH2.1 P1.5 P2.8 SW1.2 SW2.2 | length 61.8
  Top Copper w0.254: MH1.1 3.5,12.85 5.2,14.55 SW1.2 5.2,15.45 3.973,16.677 3.973,16.952 3.925,17 D1.2 ; P1.5 12.895,10 MH2.1 18.5,12.85 16.8,14.55 SW2.2 16.8,15.45 18.027,16.677 18.027,16.952 18.075,17 D2.2 ; v1(14.3,18.4) L2.1
  Signal Layer 1 w0.254: v1(14.3,18.4) 5.9,10 MH1.1 6.25,7.25 15.75,7.25 MH2.1
  Bottom Copper w0.254: P2.8 2.11,8.61 MH1.1
GND_M: C1.2 C2.2 C3.2 C4.2 L2.2 U1.1 U1.2 U1.3 U1.4 U1.5 U1.16 U1.18 U1.29 U1.30 U1.45 U1.46 U1.47 U1.55
  other v1: 0.75,20.35 2,20.35 3.5,20.35 5,20.35 6.5,20.35 13.675,21.45 14.3,21.45 14.925,21.45 0.75,21.65 2,21.65 3.5,21.65 5,21.65 15.5,21.65 21.25,21.65 9.9,22.25 0.75,23.15 2,23.15 3.5,23.15 5,23.15 6.5,23.15 14,23.15 15.5,23.15 20,23.15 21.25,23.15 9.9,24.075 0.75,24.65 2,24.65 3.5,24.65 5,24.65 14,24.65 15.5,24.65 20,24.65 21.25,24.65 6.375,25.7 15.55,25.725 0.75,26.15 2,26.15 20,26.15 21.25,26.15 5.875,26.45 16.1,26.475 7.425,27.275 14.575,27.325 0.75,27.65 2,27.65 20,27.65 21.25,27.65 8.275,28.05 3.5,28.2 5,28.2 13.025,28.25 0.75,29.15 2,29.15 12.5,29.15 18.5,29.15 20,29.15 21.25,29.15 5.825,29.45 0.75,30.65 2,30.65 9.5,30.65 11,30.65 12.5,30.65 18.5,30.65 20,30.65 21.25,30.65 5.6,30.875 0.75,32.15 2,32.15 3.5,32.15 5,32.15 9.5,32.15 11,32.15 12.5,32.15 17,32.15 18.5,32.15 20,32.15 21.25,32.15 5.925,33.075 0.75,33.65 2,33.65 3.5,33.65 5,33.65 9.5,33.65 11,33.65 12.5,33.65 17,33.65 18.5,33.65 20,33.65 21.25,33.65 5.9,34.15 8.175,34.85 0.75,35.15 2,35.15 3.5,35.15 5,35.15 5.9,35.15 8.675,35.15 10.025,35.15 11,35.15 11.975,35.15 13.325,35.15 16.075,35.15 17,35.15 18.5,35.15 20,35.15 21.25,35.15
GREEN: D3.3 R5.2 | length 8.9
  Top Copper w0.152: D3.3 v1(12.975,13.95) ; v1(17.9,18.875) R5.2
  Bottom Copper w0.152: v1(12.975,13.95) 12.975,13.975 17.875,18.875 v1(17.9,18.875)
GREEN_M: R5.1 U1.36 | length 12.1
  Top Copper w0.152: U1.36@14.5,30.325 15.825,30.325 16.134,30.016 16.134,28.513 17.9,26.747 R5.1
LFCLK1: C2.1 U1.14 X1.2 | length 4.8
  Top Copper w0.152: C2.1 X1.2 4.775,26.9 6,28.125 U1.14@7.5,28.125
LFCLK2: C1.1 U1.13 X1.1 | length 3.7
  Top Copper w0.152: C1.1 X1.1 4.775,29.5 5.6,28.675 U1.13@6.6,28.675
NetR9_2: R9.2 U1.20 | length 10.4
  Top Copper w0.152: U1.20 v1(9.35,29) ; R9.2 v1(9.8,21.125)
  Bottom Copper w0.152: v1(9.35,29) 9.35,21.575 v1(9.8,21.125)
NetR10_2: R10.2 U1.22 | length 10.6
  Top Copper w0.152: U1.22 v1(10.45,29) ; R10.2 v1(11.4,21.125)
  Bottom Copper w0.152: v1(10.45,29) 10.45,22.075 v1(11.4,21.125)
NetR11_2: R11.2 U1.24 | length 10.9
  Top Copper w0.152: U1.24 v1(11.55,29) ; R11.2 v1(13,21.125)
  Bottom Copper w0.152: v1(11.55,29) 13,27.55 v1(13,21.125)
NetR12_2: R12.2 U1.19 | length 6.1
  Top Copper w0.152: U1.19 8.8,25.25 9,25.05 R12.2
NetR13_2: R13.2 U1.21 | length 6.3
  Top Copper w0.152: U1.21 9.9,25.275 10.6,24.575 R13.2
NetR14_2: R14.2 U1.23 | length 6.5
  Top Copper w0.152: U1.23 11,22.275 12.2,21.075 R14.2
nRESET: P1.3 R3.2 | length 17.2
  Top Copper w0.152: v1(11,8.5) P1.3 ; v1(19.494,18.864) 19.5,18.87 R3.2
  Bottom Copper w0.152: v1(11,8.5) 11,11.196 15.554,15.75 18.45,15.75 19.494,16.794 v1(19.494,18.864)
nRESET_M: R3.1 U1.39 | length 13.2
  Top Copper w0.152: U1.39 16.692,30.658 16.692,28.744 18.479,26.957 18.479,21.821 19.5,20.8 R3.1
P0.03: P2.7 R12.1 | length 17.2
  Top Copper w0.152: v1(9,18.875) R12.1
  Bottom Copper w0.152: P2.7 4.65,5.5 6.275,7.125 6.275,16.15 v1(9,18.875)
P0.04: P2.6 R9.1 | length 17
  Top Copper w0.152: v1(9.8,18.875) R9.1
  Bottom Copper w0.152: P2.6 7.19,4.439 6.554,5.074 6.554,15.629 v1(9.8,18.875)
RED: D3.4 R4.2 | length 11.8
  Top Copper w0.152: D3.4 10.35,13.95 10.674,13.626 10.674,13.526 10.9,13.3 13.05,13.3 18,18.25 18.7,18.95 R4.2
RED_M: R4.1 U1.37 | length 12.2
  Top Copper w0.152: U1.37@15.4,30.875 16.075,30.875 16.413,30.537 16.413,28.628 18.2,26.841 18.2,21.35 18.7,20.85 R4.1
RTS: P2.5 R13.1 | length 18.1
  Top Copper w0.152: v1(10.6,18.875) R13.1
  Bottom Copper w0.152: P2.5 6.834,7.116 6.834,15.109 v1(10.6,18.875)
RXD: P2.2 R11.1 | length 25.8
  Top Copper w0.152: v1(13,18.875) R11.1
  Bottom Copper w0.152: v1(13,18.875) 7.399,13.274 7.399,7.351 8.817,5.933 15.637,5.933 P2.2
SWCLK: P1.4 R2.2 | length 14.7
  Top Copper w0.152: P1.4 12.301,11.946 13.172,11.946 15.898,14.672 v1(15.9,15.2) v1(15.9,15.2) ; v1(20.3,18.875) R2.2
  Bottom Copper w0.152: v1(15.9,15.2) 18.295,15.2 20.3,17.205 v1(20.3,18.875)
SWCLK_M: R2.1 U1.43 | length 15.8
  Top Copper w0.152: U1.43@15.4,34.175 U1.43 15.871,33.679 15.871,31.884 16.971,30.784 16.971,28.859 18.758,27.072 18.758,22.342 20.3,20.8 R2.1
SWDIO: P1.2 R1.2 | length 16.3
  Top Copper w0.152: P1.2 11.335,12.25 12.7,12.25 15.017,14.567 v1(15.083,14.567) ; v1(21.1,18.875) R1.2
  Bottom Copper w0.152: v1(15.083,14.567) 15.113,14.537 18.037,14.537 21.1,17.6 v1(21.1,18.875)
SWDIO_M: R1.1 U1.44 | length 18
  Top Copper w0.152: U1.44@14.5,34.725 15.7,34.725 15.873,34.552 15.873,34.152 16.15,33.875 16.15,32 17.25,30.9 17.25,28.975 19.05,27.175 19.05,22.445 20.52,20.975 20.925,20.975 21.1,20.8 R1.1
TXD: P2.3 R10.1 | length 23.1
  Top Copper w0.152: v1(11.4,18.875) R10.1
  Bottom Copper w0.152: v1(11.4,18.875) 7.113,14.588 7.113,7.237 9.025,5.325 13.705,5.325 P2.3
pads on no net: P1.0 P1.6 U1.6 U1.7 U1.8 U1.9 U1.10 U1.11 U1.12 U1.15 U1.25 U1.26 U1.27 U1.28 U1.33 U1.34 U1.38 U1.40 U1.41 U1.42 U1.48 U1.49 U1.50 U1.51 U1.52 U1.53 U1.54 U1.56 U1.57 U1.58 U1.59 U1.60 U1.61 U1.62 U1.63 U1.64 U1.66 U1.67 U1.68

## Polygon pours and split planes (outlines as drawn)
GND_M on Top Copper "GND_M_L01_P010" (solid, remove dead copper, pour order 10): 0,40 0,20 22,20 22,40
GND_M on Bottom Copper "GND_M_L04_P011" (solid, remove dead copper, pour order 11): 0,40 0,20 22,20 22,40
GND_M on Signal Layer 1 "NONET_L-01_P-001" (solid, remove dead copper, pour order 14): 0,35.5 22,35.5 22,20 0,20
3V3_M on Signal Layer 2 "NONET_L-01_P-001" (solid, remove dead copper, pour order 16): 0,35.5 22,35.5 22,20 0,20

## Keep-outs
Keep-Out Layer:
  the board outline again, w0.025

## Other copper
Top Copper:
  pour cut-out: 10.1,10.625 11.9,10.625 12.25,10.275 12.25,9.725 11.9,9.375 10.1,9.375 10.1,9.4 9.75,9.75 9.75,10.275
  pour cut-out: 0,40 0,35.5 22,35.5 22,40
Bottom Copper:
  pour cut-out: 0,40 0,35.5 22,35.5 22,40
  pour cut-out: 9.688,0.4 9.688,1.45 12.313,1.45 12.313,0.4
  text "BREC" at 12.512,0.614 h1.27

## Silkscreen, mask and mechanical layers (free items; w line width, h text height)
Top Overlay:
  text "B219" at 16.46,37.867 h2.54
  text "u" at 21.05,27.65 h3.81 r90
  text "vA" at 0.5,7 h1.52
  text "G" at 1.724,5.339 h1.27
  text "P3" at 4.026,5.339 h1.27
  text "P4" at 6.577,5.325 h1.27
  text "RT" at 9.025,5.325 h1.27
  text "CT" at 11.534,5.339 h1.27
  text "TX" at 14.117,5.325 h1.27
  text "RX" at 16.611,5.325 h1.27
  text "3.3" at 19.136,5.314 h1.27
Bottom Overlay:
  text "BMD-340 / CARRIER / SMALL-SIZE" at 16.4,30.3 h1.52
  text "u" at 15.913,24.994 h3.81
  text "www.u-blox.com" at 18.806,22.309 h2.5
Route Tool Path:
  the board outline again, w0.127